# Altium PCB PCB7.PcbDoc
Units mm, origin at the board's own origin, x right, y up, seen from the top; angles counter-clockwise.
Board outline 162.31 x 68.96 mm, 2 copper layers (Top Layer, Bottom Layer); 35 components, 45 nets, 246 pads, 29 vias.
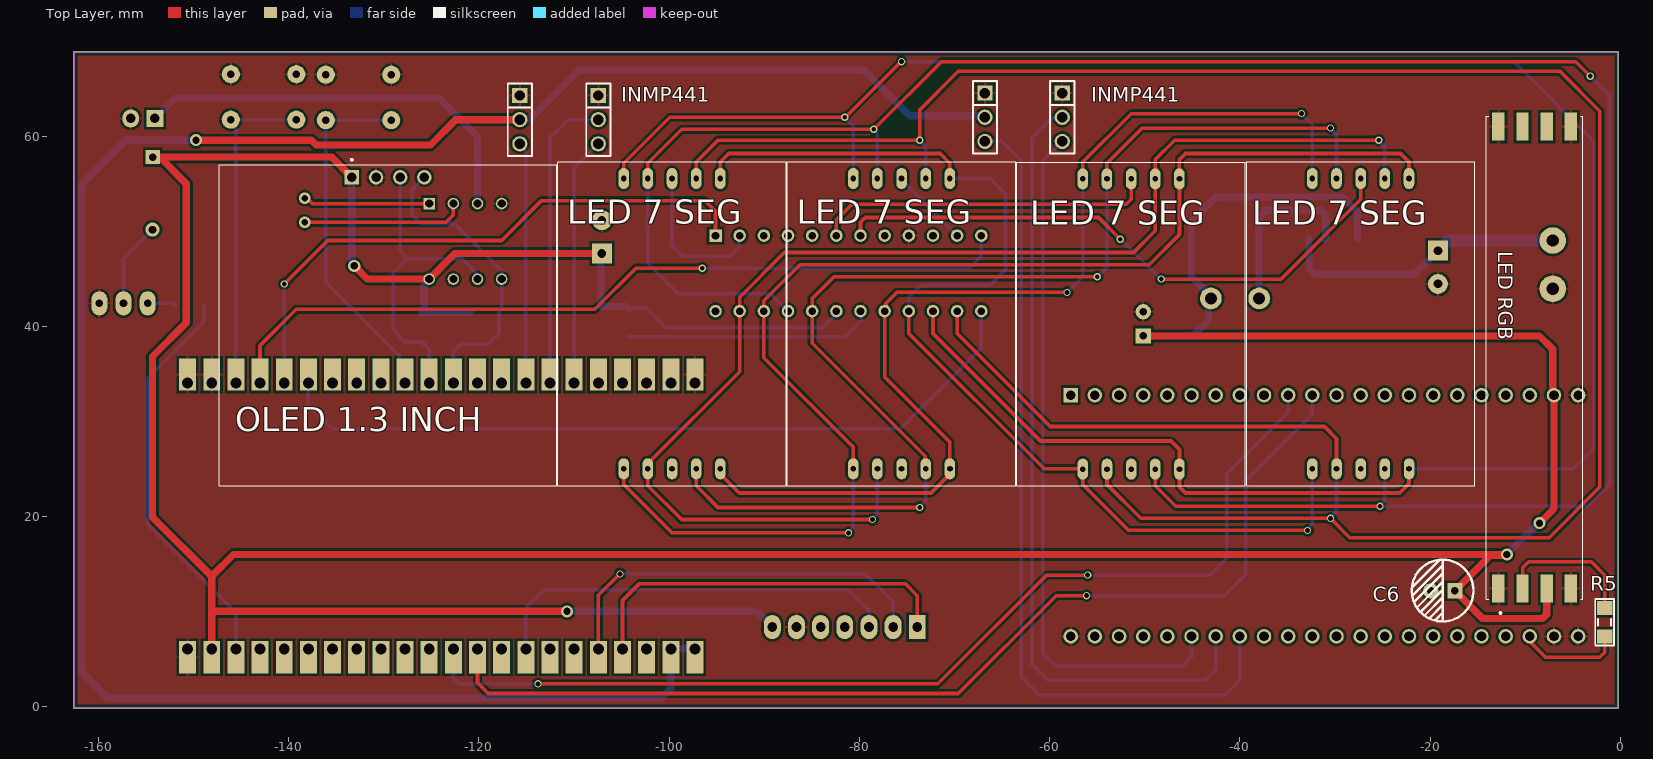
[diagram p0: Top Layer view]
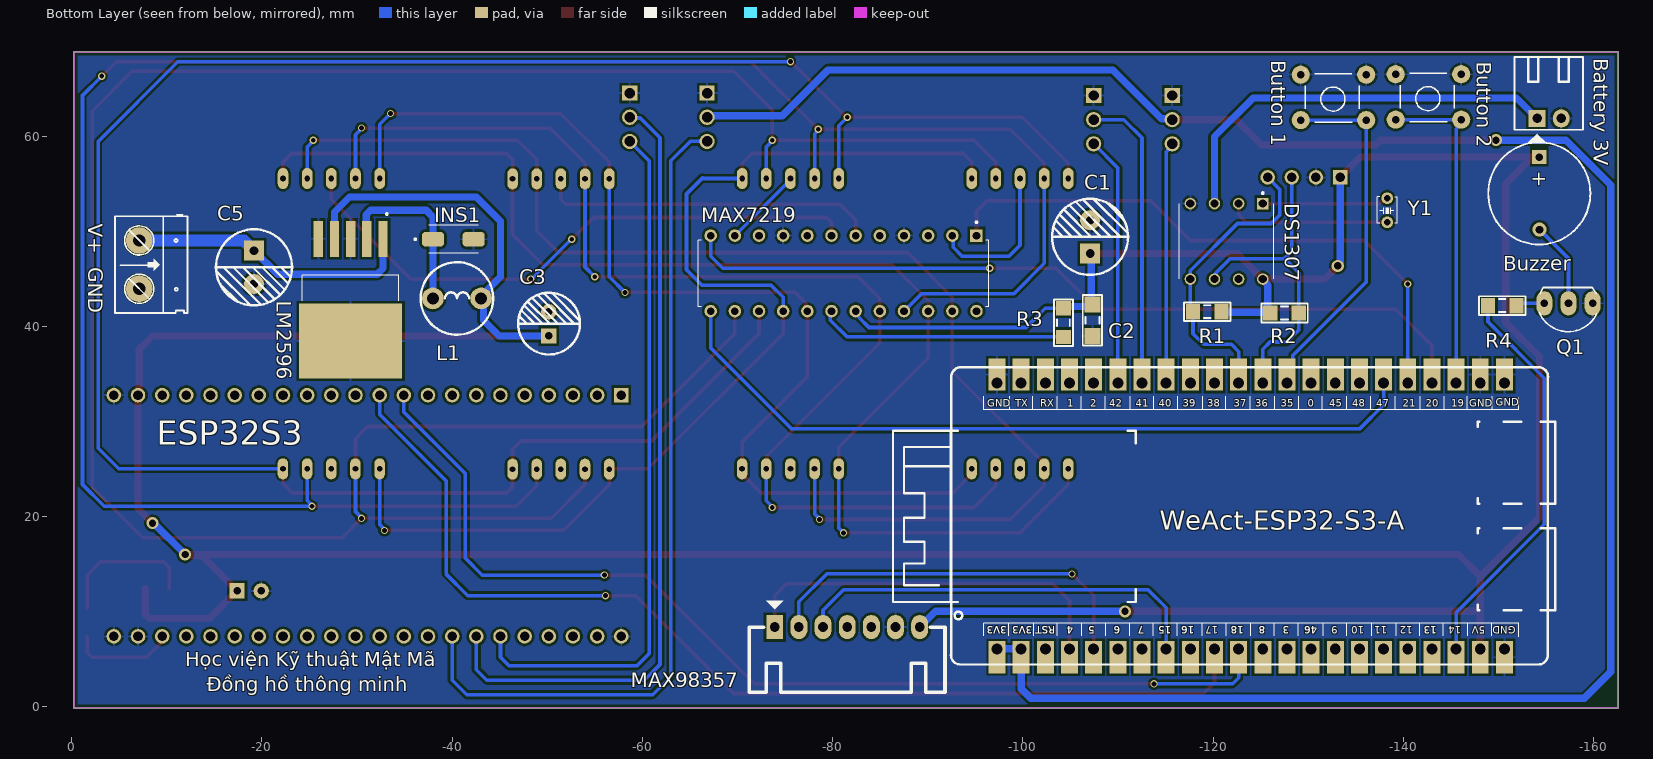
[diagram p1: Bottom Layer view, seen from below]
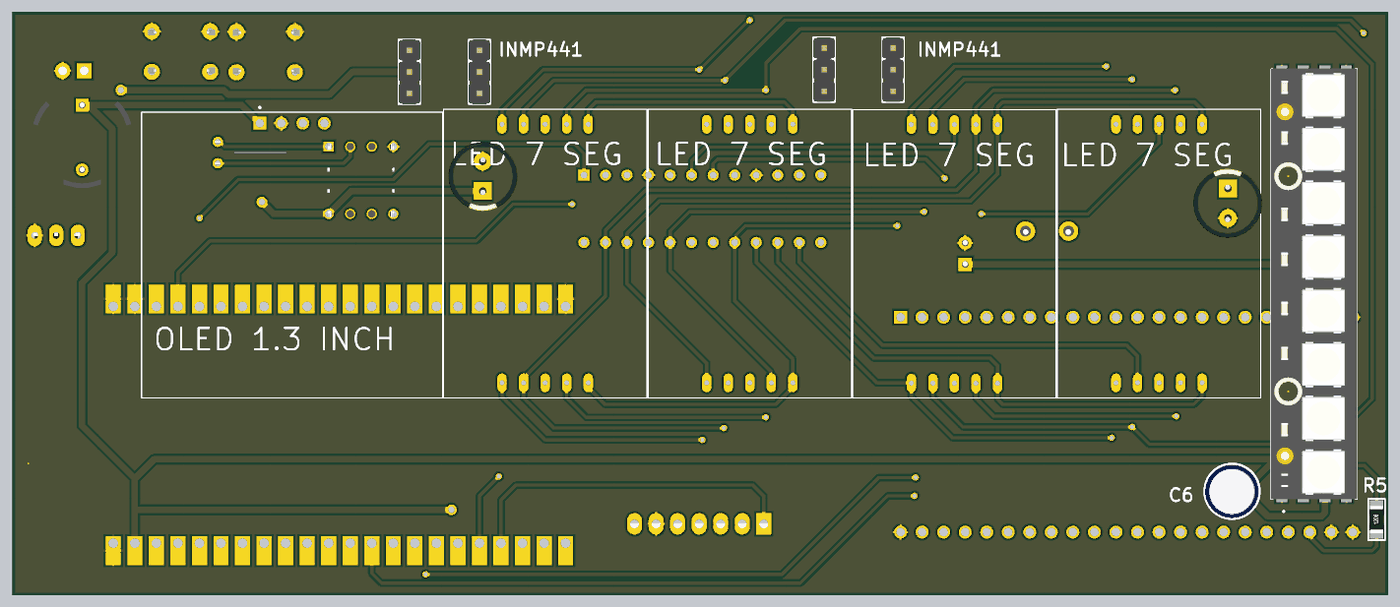
[diagram p2: 3D render of the assembled board from above, using the file's embedded part models]
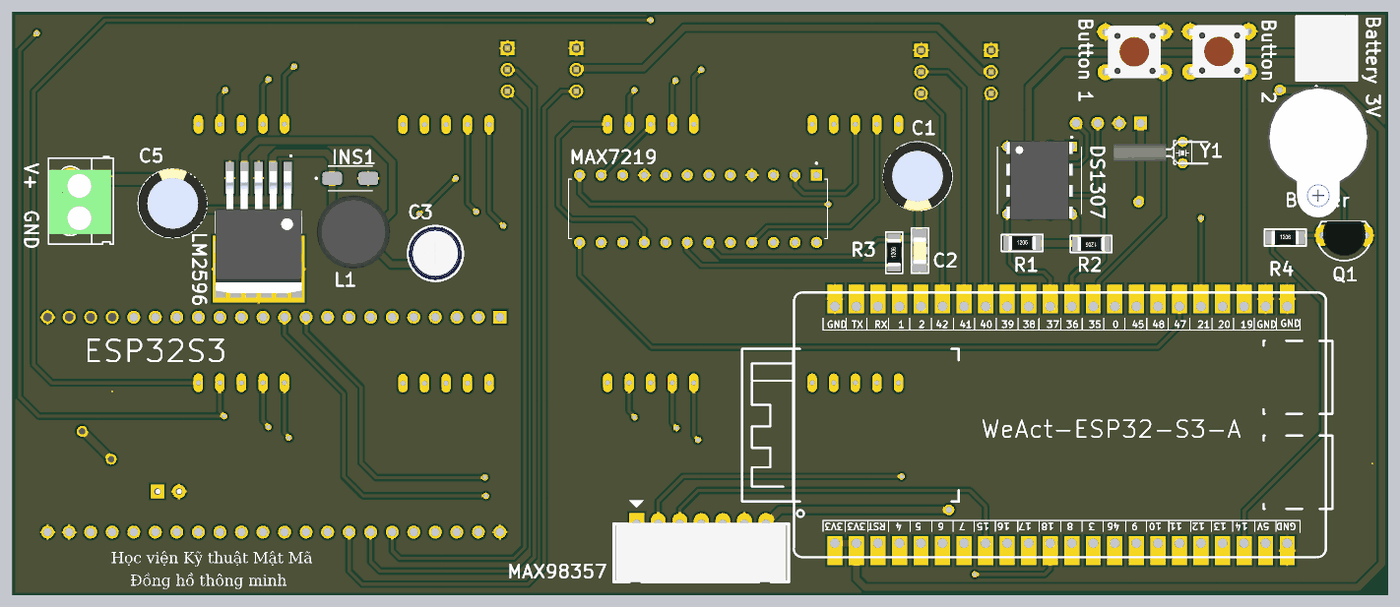
[diagram p3: 3D render of the assembled board from below, using the file's embedded part models]

## Layer stack, top to bottom
Top Solder: solder mask 0.0102, Solder Resist, Dk 3.5
Top Layer: signal copper 0.0356
Dielectric 1: dielectric 0.32, FR-4, Dk 4.8
Bottom Layer: signal copper 0.0356
Bottom Solder: solder mask 0.0102, Solder Resist, Dk 3.5

## Board outline
-162.56,-0.127 -0.254,-0.127 -0.254,4.064 -0.254,68.834 -162.56,68.834

## Design rules (kind name [scope] priority, off if disabled: settings)
Clearance [All] p1: gap=0.254 ignorepadtopadclearanceinfootprint=FALSE except(0: Arc-Hole Track-Hole SMDPad-Hole THPad-Hole Via-Hole Fill-Hole Poly-Hole Region-Hole Text-Hole)
ComponentClearance [All] p1: gap=0 collisioncheckmode=3 verticalgap=0 showdistances=FALSE
PolygonConnect [All] p1: connectstyle=Relief reliefconductorwidth=0.254 reliefentries=4 polygonreliefangle="90 Angle" airgapwidth=0.254
RoutingVias [All] p1: holewidth=0.711 width=1.27 viastyle="Through Hole" minholewidth=0.711 minwidth=1.27 maxholewidth=0.711 maxwidth=1.27
SolderMaskExpansion [All] p1: expansion=0.102 istentingtop=FALSE
Width [All] p1: maxlimit=1.27 minlimit=0.381 preferedwidth=0.762
29 further rules are at their usual default settings.

## Classes and differential pairs
component class Display: "Battery 3V" C1 C2 DS1307 "LED 7 SEG" MAX7219 "OLED 1.3 INCH" R1 R2 R3 Y1
component class ESP32S3: C3 C5 C6 INS1 L1 "LED RGB" Q1 R4 R5

## Components (designator, comment, footprint, x,y, rotation, side; value= is the part's Value field where it differs from the comment)
"Battery 3V" "Battery 3V" "Header 2P DC 2.54" -154.051,61.849 r90 bottom (schematic designator H1)
"Button 1" "Button" "Nut Nhan 4 Chan Cam 6x6" -135.763,61.468 r0 bottom (schematic designator BT1)
"Button 2" "Button" "Nut Nhan 4 Chan Cam 6x6" -145.745,61.519 r0 bottom (schematic designator BT2)
Buzzer "Coi Chip Speaker" "Coi Chip Speacker" -154.292,57.785 r270 bottom (schematic designator LS1)
C1 "470uF" "TU HOA 8mm" -107.061,49.403 r90 bottom
C2 "102" "tu 1206" -107.315,40.64 r270 bottom
C3 "220uF" "Tu Hoa 6.5MM" -50.19,40.284 r90 bottom
C5 "680uF" "TU HOA 8mm" -19.177,46.2 r270 bottom
C6 "220uF" "Tu Hoa 6.5MM" -18.694,12.217 r180 top
DS1307 "DS1307" DIP794W47P254L991H457Q8 -121.412,48.928 r270 bottom (schematic designator IC1)
ESP32S3 "ESP32-S3-DEVKITC-1-N8R2" XCVR_ESP32-S3-DEVKITC-1-N8R2 -27.815,21.336 r270 bottom (schematic designator U3)
INMP441 "MIC INMP441" "JP 1x3 DT" -58.674,64.516 r270 top (schematic designator JP3)
INMP441 "MIC INMP441" "JP 1x3 DT" -107.442,64.262 r270 top (schematic designator JP5)
INS1 "IN5822" DIOM5226X240N -40.132,49.149 r180 bottom
JP2 "Pinout MIC INMP441" "JP 1x3 DT" -66.802,64.516 r270 top
JP4 "Pinout MIC INMP441" "JP 1x3 DT" -115.697,64.262 r270 top
L1 "33uH" "CUON CAM 100uH3A" -40.513,42.926 r180 bottom
"LED 7 SEG" "Led 7 seg" 2.3_7-SEG_DIS -63.565,59.708 r0 top (schematic designator DS2)
"LED 7 SEG" "Led 7 seg" 2.3_7-SEG_DIS -39.305,20.846 r180 top (schematic designator DS4)
"LED 7 SEG" "Led 7 seg" 2.3_7-SEG_DIS -63.435,20.81 r180 top (schematic designator DS3)
"LED 7 SEG" "Led 7 seg" 2.3_7-SEG_DIS -87.695,59.708 r0 top (schematic designator DS1)
"LED RGB" "1426" LED_1426 -9.017,36.703 r90 top (schematic designator D1)
LM2596 "LM2596S-5.0" TO170P1524X483-6N -29.337,42.799 r270 bottom (schematic designator VR1)
MAX7219 "MAX7219EWG" DIP794W47P254L3054H457Q24 -81.153,45.56 r270 bottom (schematic designator U1)
MAX98357 "Pinout MAX89375" "Header 7P DC 2.54" -73.913,8.382 r270 bottom (schematic designator H2)
"OLED 1.3 INCH" "OLED_128X64_1.3_I2C" LCD_OLED_128X64_1.3_I2C -129.54,40.109 r0 top (schematic designator DS5)
Q1 "C1815" TO92 -157.353,42.418 r0 bottom value=C9014
R1 "4.7k" "tro smd 1206" -119.38,41.529 r180 bottom
R2 "4.7k" "tro smd 1206" -127.508,41.402 r0 bottom
R3 "47k" "tro smd 1206" -104.267,40.386 r90 bottom
R4 "220" "tro smd 1206" -150.392,42.164 r180 bottom
R5 "220" "tro smd 1206" -1.651,8.89 r90 top
U2 "WeAct-ESP32-S3-A" WeAct-ESP32-S3-A -126.873,19.685 r90 bottom
"V+  GND" "Nguồn từ pin: 7.4V" "Con 2 KF301 5.08" -7.112,49.022 r270 bottom (schematic designator KF1)
Y1 "32.768Khz" "Thach Anh 2 Chan 32,768 KHz" -138.303,50.927 r0 bottom value=4Mhz

## Footprints (in the part's own frame and the unit in brackets; to place one, negate y for a bottom-side part, rotate by r counter-clockwise, add the part's x,y. Pads: shape width x height; smd on the part's side, far side on the other; paste and mask are expansions set on the pad)
2.3_7-SEG_DIS [mm]
  oval 1.108x2.216 hole 0.6: 1(-17.08,-34.689) 2(-14.54,-34.689) 3(-12,-34.689) 4(-9.46,-34.689) 5(-6.92,-34.689) 6(-6.923,-4.173) 7(-9.463,-4.173) 8(-12.003,-4.173) 9(-14.543,-4.173) 10(-17.083,-4.173)
  silkscreen extent -24,-36.45 0,-2.41
"Coi Chip Speacker" [mm]
  rect 1.5x1.5 hole 0.8: 1(0,0)
  round 1.5 hole 0.8: 2(7.62,0.013)
  silkscreen extent -1.55,-5.38 9.18,5.36, body extent -2.22,-6 13.24,6, height 4.5
"Con 2 KF301 5.08" [mil]
  round 110 hole 50: 1(0,0) 2(200,0)
  silkscreen extent -106,-100 300,200, body extent -45,-97 255,190, height 335
"CUON CAM 100uH3A" [mil] "100uH3A"
  round 90 hole 50: 1(-100,0) 2(100,0)
  silkscreen extent -150,-150 150,150, body extent -171,-175 171,167, height 394
DIOM5226X240N [mm]
  rrect50% 2.33x1.55 smd: A(2.135,0) C(-2.135,0)
  silkscreen extent -4.1,-1.46 2.6,1.46
DIP794W47P254L991H457Q8 [mm]
  rect 1.21x1.21 / inner round 1.21 / far side rect 1.21x1.21 hole 0.86: 1(-3.97,3.81)
  round 1.21 hole 0.86: 2(-3.97,1.27) 3(-3.97,-1.27) 4(-3.97,-3.81) 5(3.97,-3.81) 6(3.97,-1.27) 7(3.97,1.27) 8(3.97,3.81)
  silkscreen extent -5.17,-4.95 3.94,4.95, body extent -4.69,-3.95 4.69,3.95, height 4.57
DIP794W47P254L3054H457Q24 [mm]
  rect 1.318x1.318 / inner round 1.318 / far side rect 1.318x1.318 hole 0.81: 1(-3.97,13.97)
  round 1.318 hole 0.81: 2(-3.97,11.43) 3(-3.97,8.89) 4(-3.97,6.35) 5(-3.97,3.81) 6(-3.97,1.27) 7(-3.97,-1.27) 8(-3.97,-3.81) 9(-3.97,-6.35) 10(-3.97,-8.89) 11(-3.97,-11.43) 12(-3.97,-13.97) 13(3.97,-13.97) 14(3.97,-11.43) 15(3.97,-8.89) 16(3.97,-6.35) 17(3.97,-3.81) 18(3.97,-1.27) 19(3.97,1.27) 20(3.97,3.81) 21(3.97,6.35) 22(3.97,8.89) 23(3.97,11.43) 24(3.97,13.97)
  silkscreen extent -5.47,-15.27 3.49,15.27
"Header 2P DC 2.54" [mil]
  rect 70x70 hole 39.37 unplated: 1(0,0)
  oval 75x70 hole 39.37 unplated: 2(0,-100)
  silkscreen extent -100,-190 255,93, body extent -50,-190 250,90, height 237
"Header 7P DC 2.54" [mil]
  rect 100x70 hole 40: 1(0,0.04)
  oval 100x70 hole 40: 2(0,100.04) 3(0,200.04) 4(0,300.04) 5(0,400.04) 6(0,500.04) 7(0,600.04)
  silkscreen extent -110,-105 270,705, body extent -5,-94 271,694, height 237
"JP 1x3 DT" [mm]
  rect 1.6x1.6 hole 1.1: 1(0,0)
  round 1.6 hole 1.1: 2(2.54,0) 3(5.08,0)
  silkscreen extent -1.27,-1.27 6.35,1.27, body extent -1.27,-1.27 6.35,1.27, height 8.54
LCD_OLED_128X64_1.3_I2C [mm]
  rect 1.508x1.508 / inner round 1.508 / far side rect 1.508x1.508 hole 1: 1(-3.81,15.55)
  round 1.508 hole 1: 2(-1.27,15.55) 3(1.27,15.55) 4(3.81,15.55)
  round 0 all layers, no hole: ""(-31.115,-24.615) ""(-31.115,-24.615) ""(-31.115,-24.615) ""(-31.115,-24.615)
  silkscreen extent -17.75,-16.85 17.75,17.5
LED_1426 [mm]
  rect 2.95x1.3 smd: 1(-24.28,3.81) 2(-24.28,1.27) 3(-24.28,-1.27) 4(-24.28,-3.81) 5(24.28,-3.81) 6(24.28,-1.27) 7(24.28,1.27) 8(24.28,3.81)
  round 0 all layers, no hole: SH1(-12.7,3.048) SH2(12.7,3.048)
  silkscreen extent -26.95,-5.08 25.4,5.08, body extent -25.4,-5.08 25.4,5.08, height 3.19
"Nut Nhan 4 Chan Cam 6x6" [mil] "SW button 4pin, 250 x250 mil"
  round 75 hole 31: 1(-13,-8) 1(258,-8) 2(-13,-196) 2(258,-196)
  silkscreen extent 15,-215 240,0, body extent -31,-225 281,19, height 276
"Thach Anh 2 Chan 32,768 KHz" [mil]
  round 48 hole 28: 1(0,0) 2(0,-100)
  silkscreen extent -42,-106 42,4, body extent -120,-105 321,6, height 66
TO92 [mil] "TO-92"
  oval 66x100 hole 32: 1(-100,0) 2(0,0) 3(100,0)
  silkscreen extent -117,-65 120,118, body extent -109,-66 109,96, height 245
TO170P1524X483-6N [mm]
  rect 3.79x0.99 smd: 1(-6.4,3.4) 2(-6.4,1.7) 3(-6.4,0) 4(-6.4,-1.7) 5(-6.4,-3.4)
  rect 7.88x10.84 smd paste-6: 6(4.35,0)
  silkscreen extent -9.1,-5.08 0.09,5.08, body extent -7.18,-5.08 7.18,5.08, height 4.65
"tro smd 1206" [mm]
  rect 1.5x1.6 smd: 1(-1.5,0) 2(1.5,0)
  silkscreen extent -2.44,-0.99 2.44,0.99, body extent -1.6,-0.8 1.6,0.8, height 0.6
"tu 1206" [mm]
  rect 1.7x1.7 smd: 1(-1.65,0) 2(1.65,0)
  silkscreen extent -2.67,-1.02 2.67,1.02, body extent -1.57,-0.8 1.63,0.8, height 0.94
"Tu Hoa 6.5MM" [mm]
  rect 1.6x1.6 hole 0.8: 1(-1.295,0.025)
  round 1.6 hole 0.8: 2(1.245,0.025)
  silkscreen extent -3.25,-3.25 3.25,3.25, body extent -3.15,-3.15 3.2,3.2, height 14.55
"TU HOA 8mm" [mm]
  rect 2.1x2.1 hole 0.9: 1(-1.75,0)
  round 2.1 hole 0.9: 2(1.75,0)
  silkscreen extent -4,-4 4,4, body extent -4.1,-4.07 4.1,4.13, height 13.81
WeAct-ESP32-S3-A [mil]
  rect 133x70 hole 45 copper offset -35,0 paste+0 mask+2: 1(-535,1165) 2(-535,1065) 3(-535,965) 4(-535,865) 5(-535,765) 6(-535,665) 7(-535,565) 8(-535,465) 9(-535,365) 10(-535,265) 11(-535,165) 12(-535,65) 13(-535,-35) 14(-535,-135) 15(-535,-235) 16(-535,-335) 17(-535,-435) 18(-535,-535) 19(-535,-635) 20(-535,-735) 21(-535,-835) 22(-535,-935)
  rect 133x70 hole 45 copper offset 35,0 paste+0 mask+2: 23(565,-935) 24(565,-835) 25(565,-735) 26(565,-635) 27(565,-535) 28(565,-435) 29(565,-335) 30(565,-235) 31(565,-135) 32(565,-35) 33(565,65) 34(565,165) 35(565,265) 36(565,365) 37(565,465) 38(565,565) 39(565,665) 40(565,765) 41(565,865) 42(565,965) 43(565,1065) 44(565,1165)
  silkscreen extent -600,-1145 630,1595
XCVR_ESP32-S3-DEVKITC-1-N8R2 [mm]
  rect 1.53x1.53 / inner round 1.53 / far side rect 1.53x1.53 hole 1.02: J1_1(-11.43,29.97)
  round 1.53 hole 1.02: J1_2(-11.43,27.43) J1_3(-11.43,24.89) J1_4(-11.43,22.35) J1_5(-11.43,19.81) J1_6(-11.43,17.27) J1_7(-11.43,14.73) J1_8(-11.43,12.19) J1_9(-11.43,9.65) J1_10(-11.43,7.11) J1_11(-11.43,4.57) J1_12(-11.43,2.03) J1_13(-11.43,-0.51) J1_14(-11.43,-3.05) J1_15(-11.43,-5.59) J1_16(-11.43,-8.13) J1_17(-11.43,-10.67) J1_18(-11.43,-13.21) J1_19(-11.43,-15.75) J1_20(-11.43,-18.29) J1_21(-11.43,-20.83) J1_22(-11.43,-23.37) J3_1(13.93,29.97) J3_2(13.93,27.43) J3_3(13.93,24.89) J3_4(13.93,22.35) J3_5(13.93,19.81) J3_6(13.93,17.27) J3_7(13.93,14.73) J3_8(13.93,12.19) J3_9(13.93,9.65) J3_10(13.93,7.11) J3_11(13.93,4.57) J3_12(13.93,2.03) J3_13(13.93,-0.51) J3_14(13.93,-3.05) J3_15(13.93,-5.59) J3_16(13.93,-8.13) J3_17(13.93,-10.67) J3_18(13.93,-13.21) J3_19(13.93,-15.75) J3_20(13.93,-18.29) J3_21(13.93,-20.83) J3_22(13.93,-23.37)

## Part data
"Battery 3V": library part "Header 2P 2.54 Duc Cong", "Cắm", Chung_Loai=Cắm, Don_Vi=Con, Ma_Hang=MH002852, Ten_Linh_Kien="Header 2P XH2.54-2P Đực Cong"
"Button 1" "Button 2": library part "Nut Nhan 4 Chan Cam 6x6", "Nut Nhan 4 Chan 6x6mm", Ma_Hang=MH004584, Ten="Nút Nhấn 4 Chân 6x6x5MM DIP"
Buzzer: "Còi chip"
C1: library part "Tu Hoa 470uF 50V 10x17", "Cắm", Chung_Loai=Cắm, Don_Vi=Con, Ma_Hang=MH006866, So_Chan=2, Ten_Linh_Kien="Tụ Hóa 470uF 50V"
C2: library part "Tu 1206 102 50V 10%", "Dán", Chung_Loai=Dán, Don_Vi=Con, Ma_Hang=MH004542, So_Chan=2, Ten_Linh_Kien="Tụ 1206 102-1nF 10% 50V"
C3 C5 C6: library part "Tu Hoa 22uF 400V 13x20", "Cắm", Chung_Loai=Cắm, Don_Vi=Con, Ma_Hang=MH004801, So_Chan=2, Ten_Linh_Kien="Tụ Hóa 22uF 400V 13x20MM"
DS1307: "Real Time Clock (RTC) IC Clock/Calendar 56B IÂ²C, 2-Wire Serial 8-SOIC (0.154, 3.90mm Width)", Package="DIP-8 Maxim Integrated", Availability="In Stock", Check_prices=https://www.snapeda.com/parts/DS1307/Maxim+Integrated/view-part/?ref=eda, MF="Maxim Integrated", MP=DS1307, Price=None, Purchase-URL=https://pricing.snapeda.com/search/part/DS1307/?ref=eda, SnapEDA_Link=https://www.snapeda.com/parts/DS1307/Maxim+Integrated/view-part/?ref=snap
ESP32S3: "WiFi Development Tools - 802.11 (Engineering Samples Only) ESP32-S3 General-Purpose Development Board, ESP32-S3-WROOM-1-N8R2, with Pin Header", Package=None, Check_prices=https://www.snapeda.com/parts/ESP32-S3-DEVKITC-1-N8R2/Espressif+Systems/view-part/?ref=eda, MF="Espressif Systems", MP=ESP32-S3-DEVKITC-1-N8R2, SnapEDA_Link=https://www.snapeda.com/parts/ESP32-S3-DEVKITC-1-N8R2/Espressif+Systems/view-part/?ref=snap
INMP441 INMP441 JP2 JP4: library part "JP 1x3 2.54 Duc Thang", "Cắm", Chung_Loai=Cắm, Don_Vi=Con, Ma_Hang=MH000903, Ten_Linh_Kien="Jump Đơn Đực 2.54MM 1x40P Thẳng 11MM"
INS1: library part B340A-13-F, "Diode Schottky 40V 3A Surface Mount SMA", Package="DO-214 Diodes Inc.", Availability=Unavailable, MF="Diodes Inc.", MP=B340A-13-F, Price=None, SnapEDA_Link=https://www.snapeda.com/parts/B340A-13-F/Diodes%20Inc./view-part/78704/?ref=snap
L1: library part "CUON CAM 100uH DIP", "Dán", Chung_Loai=Dán, Don_Vi=Con, Ma_Hang=MH002209, Ten_Linh_Kien="Cuộn Cảm 100uH 3A 8x10MM"
"LED 7 SEG" "LED 7 SEG" "LED 7 SEG" "LED 7 SEG": library part HDSP-511Y, "Display Modules - LED Character and Numeric Yellow 7-Segment 1 Character Common Anode 2.15V 20mA 0.673 H x 0.488 W x 0.315 D (17.10mm x 12.40mm x 8.00mm) 10-DIP (0.600, 15.24mm)", Package=None, Availability="Not in stock", Check_prices=https://www.snapeda.com/parts/HDSP-511Y/Broadcom+Limited/view-part/?ref=eda, MF="Broadcom Limited", MP=HDSP-511Y, Price=None, SnapEDA_Link=https://www.snapeda.com/parts/HDSP-511Y/Broadcom+Limited/view-part/?ref=snap
"LED RGB": "NeoPixel Stick - 8 x WS2812 5050 RGB LED with Integrated Drivers", Package=None, Check_prices=https://www.snapeda.com/parts/1426/Adafruit+Industries/view-part/?ref=eda, MF=Adafruit, MP=1426, SnapEDA_Link=https://www.snapeda.com/parts/1426/Adafruit+Industries/view-part/?ref=snap
LM2596: "SIMPLE SWITCHER&reg; 4.5V to 40V, 3A Low Component Count Step-Down Regulator", Package="TO-263-5 Texas Instruments", Availability="In Stock", Check_prices=https://www.snapeda.com/parts/LM2596S-5.0/NOPB/Texas+Instruments/view-part/?ref=eda, MF="Texas Instruments", MP=LM2596S-5.0/NOPB, Price=None, Purchase-URL=https://pricing.snapeda.com/search/part/LM2596S-5.0/NOPB/?ref=eda, SnapEDA_Link=https://www.snapeda.com/parts/LM2596S-5.0/NOPB/Texas+Instruments/view-part/?ref=snap
MAX7219: "LED Driver 64 Segment 330000uA Supply Current 24-Pin SOIC W Tube", Package="SOIC-24 Maxim", Check_prices=https://www.snapeda.com/parts/MAX7219EWG+/Analog+Devices/view-part/?ref=eda, MF="Analog Devices", MP=MAX7219EWG+, SnapEDA_Link=https://www.snapeda.com/parts/MAX7219EWG+/Analog+Devices/view-part/?ref=snap
MAX98357: library part "Header 7P 2.54 Duc Cong", "Cắm", Chung_Loai=Cắm, Don_Vi=Con, Ma_Hang=MH004118, Ten_Linh_Kien="Header 7P XH2.54-7P Đực Cong"
"OLED 1.3 INCH": "Non-Touch Graphic LCD Display Module Transmissive White OLED, Monochrome I2C 1.3 (33.02mm) 128 x 64", Package=None, Check_prices=https://www.snapeda.com/parts/OLED%20128x64%201.3%22%20I2C/UNIVERSAL-SOLDER+Electronics+Ltd/view-part/?ref=eda, MF="UNIVERSAL-SOLDER Electronics Ltd", MP="OLED 128x64 1.3&quot; I2C", SnapEDA_Link=https://www.snapeda.com/parts/OLED%20128x64%201.3%22%20I2C/UNIVERSAL-SOLDER+Electronics+Ltd/view-part/?ref=snap
Q1: library part "Trans C1815 DIP", "NPN transistor"
R1 R2 R3 R4 R5: library part "Tro 1206 5% 1k", "Dán", Chung_Loai=Dán, Don_Vi=Con, Ma_Hang=MH005904, So_Chan=2, Ten_Linh_Kien="Trở 1206 5% 1k"
"V+  GND": library part "CON 2 KF301", "Cắm", Chung_Loai=Cắm, Don_Vi=Con, Ma_Hang=MH000987, Ten_Linh_Kien="CON 2 KF301-2P 5.08MM Xanh Dương"
Y1: library part "Thach Anh 2 chan Cam", "Crystal For all Crystal 2pin."
U2: Add into BOM=yes, Convert to PCB=yes, Device=WeAct-ESP32-S3-A, Symbol=WeAct-ESP32-S3-A

## Via types
v1: diameter 0.762, hole 0.508, Top Layer to Bottom Layer, 24 vias
v2: diameter 1.27, hole 0.762, Top Layer to Bottom Layer, 5 vias

## Nets (pads, with @x,y where several pads share a name; then routed paths per layer and width w, separated by ;. In a path a pad name is that pad's centre, name@x,y a point inside that pad or via, vN(x,y) a via of type N, cw(c..) or ccw(c..) an arc to the next point about the centre after c; other vN are vias at no path point)
+3.3: JP2.2 JP4.2 U2.1 U2.2 | length 223.9
  Top Layer w0.762: v2(-149.733,59.563) -137.599,59.563 -137.091,59.055 -125.095,59.055 -122.428,61.722 JP4.2
  Bottom Layer w0.762: v2(-149.733,59.563) -157.099,59.563 -161.798,54.864 -161.798,3.683 -159.004,0.889 -100.838,0.889 -99.822,1.905 U2.2 U2.1 ; JP4.2 -115.593,61.826 -114.577,61.826 -109.474,66.929 -79.502,66.929 -74.709,62.136 -66.962,62.136 JP2.2
A: "LED 7 SEG.7" MAX7219.14 | length 261.5
  Top Layer w0.381: -97.158,55.535 -97.158,57.274 -94.869,59.563 v1(-73.66,59.563) -73.66,62.738 -69.596,66.802 -6.35,66.802 -2.159,62.611 -2.159,23.114 -7.493,17.78 -28.448,17.78 v1(-30.48,19.812) -50.419,19.812 -53.975,23.368 -53.975,25.019 ; MAX7219.14 -69.723,39.243 -59.944,29.464 -31.115,29.464 -29.842,28.191 -29.842,25.019
  Bottom Layer w0.381: v1(-73.66,59.563) -73.66,59.48 -73.028,58.848 -73.028,55.535 ; v1(-30.48,19.812) -30.48,19.883 -29.842,20.521 -29.842,25.019
B: "LED 7 SEG.6" MAX7219.16 | length 116.1
  Top Layer w0.381: -94.618,55.535 -94.615,55.538 -94.615,57.277 -93.726,58.166 -71.501,58.166 -70.488,57.153 -70.488,55.535 ; MAX7219.16 -74.803,39.243 -60.579,25.019 -56.515,25.019 -56.515,23.368 -51.689,18.542 v1(-32.893,18.542)
  Bottom Layer w0.381: MAX7219.16 -74.803,43.053 -73.533,44.323 -66.263,44.323 -64.643,45.943 -64.643,53.913 -66.325,55.595 -66.385,55.535 -70.488,55.535 ; v1(-32.893,18.542) -32.893,18.645 -32.382,19.156 -32.382,25.019
Bclk: MAX98357.2 U2.5 | length 41.4
  Top Layer w0.381: U2.5 -107.442,11.719 -105.191,13.97 v1(-105.156,13.97)
  Bottom Layer w0.381: v1(-105.156,13.97) -79.375,13.97 -76.454,11.049 MAX98357.2
Button_1: "Button 1.1" U2.32 | length 38
  Bottom Layer w0.381: -129.21,61.671 -136.093,61.671 -136.093,44.653 -128.376,36.936 -128.376,34.65 U2.32
Button_2: "Button 2.1" U2.25 | length 34.8
  Bottom Layer w0.381: U2.25 -145.542,60.776 -146.075,61.31 -146.075,61.722 -139.192,61.722
C: "LED 7 SEG.4" MAX7219.20 | length 127.1
  Top Layer w0.381: -97.155,25.019 -97.155,23.241 -94.869,20.955 v1(-73.66,20.955) ; MAX7219.20@-84.963,41.503 -84.963,38.227 -73.082,26.346 -73.082,25.076 -73.025,25.019 ; MAX7219.20 -84.963,42.926 -82.677,45.212 v1(-54.991,45.212) ; -53.978,55.535 -53.978,57.147 -50.292,60.833 v1(-30.48,60.833)
  Bottom Layer w0.381: v1(-73.66,20.955) -73.66,21.032 -73.025,21.667 -73.025,25.019 ; v1(-54.991,45.212) -53.975,46.228 -53.975,55.499 ; v1(-30.48,60.833) -30.48,60.756 -29.845,60.121 -29.845,55.535
CLK: MAX7219.13 U2.28 | length 81.5
  Bottom Layer w0.381: U2.28 -137.922,31.75 -135.382,29.21 -75.692,29.21 -67.183,37.719 MAX7219.13
Coi: R4.1 U2.20 | length 42.4
  Bottom Layer w0.381: R4.1 -148.892,40.465 -154.813,34.544 -154.813,19.177 -145.542,9.906 U2.20
D: "LED 7 SEG.2" MAX7219.23 | length 137.2
  Top Layer w0.381: v1(-78.613,19.685) -98.679,19.685 -102.235,23.241 -102.235,25.019 -102.235,25.573 -92.583,35.225 -92.583,43.053 -87.884,47.752 -51.181,47.752 -48.898,50.035 -48.898,55.499 -48.898,57.528 -46.863,59.563 v1(-25.4,59.563)
  Bottom Layer w0.381: v1(-78.613,19.685) -78.613,19.788 -78.105,20.296 -78.105,25.019 ; v1(-25.4,59.563) -25.4,59.486 -24.765,58.851 -24.765,55.535
Din: MAX98357.3 U2.8 | length 43.8
  Bottom Layer w0.381: U2.8 -115.062,10.414 -113.157,12.319 -81.153,12.319 -78.994,10.16 MAX98357.3
DIN_LED: MAX7219.1 U2.27 | length 62.4
  Top Layer w0.381: v1(-140.462,44.45) -135.89,49.022 -117.602,49.022 -113.411,53.213 -96.266,53.213 -95.123,52.07 MAX7219.1
  Bottom Layer w0.381: U2.27 v1(-140.462,44.45)
DP: "LED 7 SEG.5" MAX7219.17 | length 113.5
  Top Layer w0.381: -94.615,25.019 -94.615,24.465 -92.629,22.479 -72.471,22.479 -70.485,24.465 -70.485,25.019 -70.485,27.813 -77.343,34.671 MAX7219.17 -77.204,41.729 -77.204,42.43 -76.073,43.561 v1(-58.166,43.561) ; -56.518,55.535 -56.518,57.274 -51.435,62.357 v1(-33.528,62.357)
  Bottom Layer w0.381: v1(-58.166,43.561) -56.515,45.212 -56.515,55.499 ; v1(-33.528,62.357) -33.493,62.357 -32.385,61.249 -32.385,55.535
E: "LED 7 SEG.1" MAX7219.22 | length 136.8
  Top Layer w0.381: -104.775,25.019 -104.775,23.368 -99.695,18.288 v1(-81.153,18.288) ; -80.645,25.019 -80.645,27.305 -90.043,36.703 -90.043,42.672 -86.233,46.482 -49.53,46.482 -46.355,49.657 -46.355,55.499 ; -46.358,55.535 -46.358,57.528 -45.72,58.166 -23.114,58.166 -22.225,57.277 -22.225,55.535
  Bottom Layer w0.381: v1(-81.153,18.288) -80.645,18.796 -80.645,25.019
F: "LED 7 SEG.9" MAX7219.21 | length 236.1
  Top Layer w0.381: -102.238,55.535 -102.238,57.147 -98.679,60.706 v1(-78.486,60.706) -71.374,67.818 -4.699,67.818 v1(-3.175,66.294) ; -48.895,25.019 -48.895,23.241 -46.736,21.082 v1(-25.273,21.082)
  Bottom Layer w0.381: -102.238,55.535 -102.238,46.612 -99.06,43.434 -89.347,43.434 MAX7219.21 ; v1(-78.486,60.706) -78.486,60.603 -78.108,60.225 -78.108,55.535 ; -24.762,25.019 -24.762,21.696 -25.273,21.185 v1(-25.273,21.082) -3.429,21.082 -1.143,23.368 -1.143,64.262 v1(-3.175,66.294)
FB: "LED RGB.3" "OLED 1.3 INCH.1" Buzzer.1 C1.1 C2.1 C3.1 C6.1 DS1307.8 ESP32S3.J1_21 L1.2 LM2596.4 MAX7219.19 MAX98357.7 R1.2 R2.2 R3.2 U2.21 | length 482.9
  Top Layer w0.762: Buzzer.1 Buzzer.1@-153.543,57.785 ; U2.21 -148.082,9.906 ; -133.35,55.659 -135.476,57.785 Buzzer.1@-153.543,57.785 ; v2(-133.096,46.355) -131.699,44.958 DS1307.8 -122.527,47.653 C1.1 ; v2(-110.744,10.033) -147.955,10.033 -148.082,9.906 ; C3.1 -8.509,38.989 -7.112,37.592 -7.112,32.893 ESP32S3.J1_21 -6.985,20.833 -8.509,19.309 v2(-8.509,19.304) ; -7.747,12.423 -7.747,9.717 -8.193,9.271 -14.478,9.271 C6.1 -13.686,15.905 -12.035,15.905 v2(-11.938,16.002) -145.796,16.002 -148.082,13.716 ; Buzzer.1@-153.543,57.785 -150.749,54.991 -150.749,40.386 -154.305,36.83 -154.305,19.939 -148.082,13.716 ; -148.082,9.906 -148.082,13.716
  Bottom Layer w0.381: R3.2@-104.281,41.9 -104.271,41.91 -102.362,41.91 -100.33,39.878 -83.82,39.878 -82.755,40.943 -82.755,41.005 -82.423,41.336 MAX7219.19
  Bottom Layer w0.762: -133.35,55.659 -133.35,46.746 -133.096,46.492 v2(-133.096,46.355) ; R2.2 -125.945,41.465 -120.943,41.465 R1.2 ; R2.2@-126.008,41.452 -125.73,41.73 -125.73,44.329 -125.222,44.837 DS1307.8 ; v2(-110.744,10.033) -90.805,10.033 -89.729,8.957 -89.623,8.957 -89.154,8.488 MAX98357.7 ; C1.1 -107.188,47.526 -107.188,42.163 -107.113,42.088 -104.469,42.088 -104.281,41.9 R3.2 ; C3.1 -44.958,38.989 -43.307,40.64 -43.307,42.672 L1.2 -43.053,43.18 -45.085,45.212 -45.085,51.054 -42.545,53.594 -29.21,53.594 -27.637,52.021 LM2596.4 ; v2(-11.938,16.002) -8.636,19.304 v2(-8.509,19.304)
G: "LED 7 SEG.10" MAX7219.15 | length 235
  Top Layer w0.381: -104.778,55.535 -104.778,57.147 -99.949,61.976 v1(-81.534,61.976) -81.471,61.976 -75.629,67.818 v1(-75.565,67.818) ; MAX7219.15 -72.263,39.243 -60.96,27.94 -47.244,27.94 -46.355,27.051 -46.355,23.114 -45.72,22.479 -23.207,22.479 -22.222,23.464 -22.222,25.019
  Bottom Layer w0.381: v1(-81.534,61.976) -80.648,61.09 -80.648,55.535 -80.648,54.981 ; v1(-75.565,67.818) -11.176,67.818 -2.794,59.436 -2.794,27.178 -4.953,25.019 -22.222,25.019
GND: "Battery 3V.2" "Button 1.2" "Button 2.2" "LED RGB.1" "LED RGB.4" "LED RGB.5" "LED RGB.8" "OLED 1.3 INCH.2" "V+  GND.2" C1.2 C2.2 C3.2 C5.2 C6.2 DS1307.4 ESP32S3.J1_22 ESP32S3.J3_1 ESP32S3.J3_21 ESP32S3.J3_22 INMP441.1 INS1.A JP2.1 JP4.1 LM2596.3 LM2596.5 LM2596.6 MAX7219.4 MAX7219.9 MAX98357.6 Q1.1 U2.22 U2.23 U2.24 U2.44
LED: ESP32S3.J3_20 R5.1 | length 11
  Top Layer w0.381: ESP32S3.J3_20 -9.305,7.186 -9.305,6.638 -7.874,5.207 -2.159,5.207 -1.651,5.715 R5.1
LOAD: MAX7219.12 U2.26 | length 85.8
  Top Layer w0.381: U2.26 -143.002,37.973 -139.192,41.783 -107.811,41.783 -103.493,46.101 v1(-96.52,46.101)
  Bottom Layer w0.381: v1(-96.52,46.101) -68.453,46.101 -67.183,47.371 MAX7219.12
lrc: MAX98357.1 U2.4 | length 40.6
  Top Layer w0.381: U2.4 -104.902,11.176 -103.124,12.954 -75.184,12.954 -73.914,11.684 MAX98357.1
NetC5_1: "V+  GND.1" C5.1 LM2596.1 | length 30.5
  Bottom Layer w0.762: LM2596.1 -32.737,46.072 -32.131,45.466 -21.661,45.466 C5.1
  Bottom Layer w1.27: C5.1 -18.105,49.022 -7.112,49.022
NetD1_2: "LED RGB.2" R5.2 | length 15.1
  Top Layer w0.381: -10.287,12.423 -10.287,14.605 -9.652,15.24 -3.048,15.24 -1.651,13.843 R5.2
NetH1_1: "Battery 3V.1" DS1307.3 | length 43.5
  Bottom Layer w0.762: -154.051,61.849 -151.892,64.008 -124.206,64.008 -120.142,59.944 DS1307.3
NetIC1_1: DS1307.1 Y1.2 | length 13.3
  Top Layer w0.381: Y1.2 -138.076,53.467 -137.507,52.898 DS1307.1
NetIC1_2: DS1307.2 Y1.1 | length 17.1
  Top Layer w0.381: Y1.1 -123.444,50.927 -122.682,51.689 DS1307.2
NetINS1_C: INS1.C L1.1 LM2596.2 | length 18.6
  Bottom Layer w0.762: L1.1 -37.985,42.938 -37.985,49.137 INS1.C -37.997,51.473 -37.273,52.197 -31.434,52.197 -30.988,51.751 -30.988,49.248 LM2596.2
NetLS1_2: Buzzer.2 Q1.2 | length 9
  Bottom Layer w0.381: Q1.2 -157.353,47.117 Buzzer.2
NetQ1_3: Q1.3 R4.2 | length 3
  Bottom Layer w0.381: Q1.3 -152.146,42.418 R4.2
NetR3_1: MAX7219.18 R3.1 | length 26.2
  Bottom Layer w0.381: R3.1 -81.51,38.886 -79.756,40.64 -79.756,41.463 MAX7219.18
RX: ESP32S3.J1_10 U2.11 | length 109.9
  Top Layer w0.381: v1(-113.792,2.413) -71.755,2.413 -60.325,13.843 v1(-56.007,13.843)
  Bottom Layer w0.381: U2.11 -122.682,3.048 -122.047,2.413 v1(-113.792,2.413) ; v1(-56.007,13.843) -43.18,13.843 -41.402,15.621 -41.402,24.511 -34.925,30.988 ESP32S3.J1_10
SCK: INMP441.3@-107.442,59.182 U2.39 | length 26.2
  Bottom Layer w0.381: U2.39 -109.982,56.642 INMP441.3@-107.442,59.182
SCK_2: ESP32S3.J3_6 INMP441.3@-58.674,59.436 | length 73.4
  Bottom Layer w0.381: INMP441.3@-58.674,59.436 -60.706,57.404 -60.706,5.588 -59.436,4.318 -45.974,4.318 -45.085,5.207 ESP32S3.J3_6
SCL: "OLED 1.3 INCH.3" DS1307.6 R2.1 U2.33 | length 33.7
  Bottom Layer w0.381: -128.27,55.659 -128.27,47.879 -127.508,47.117 ; U2.33 -125.222,37.592 -125.984,38.354 -127.762,38.354 -129.008,39.6 R2.1 -129.008,45.617 -127.508,47.117 ; DS1307.6 -120.301,45.117 -120.301,45.625 -121.793,47.117 -127.508,47.117
SD: JP4.3 U2.37 | length 25.4
  Bottom Layer w0.381: JP4.3 -115.697,58.984 -115.062,58.349 U2.37
SD_2: ESP32S3.J3_8 JP2.3 | length 87.9
  Bottom Layer w0.381: JP2.3 -65.024,59.436 -62.992,57.404 -62.992,3.175 -61.087,1.27 -41.529,1.27 -40.005,2.794 ESP32S3.J3_8
SD_Loa: MAX98357.5
SDA: "OLED 1.3 INCH.4" DS1307.5 R1.1 U2.34 | length 31.9
  Bottom Layer w0.381: -125.73,55.659 -127,54.389 -127,51.689 -126.111,50.8 -122.555,50.8 -117.608,45.853 -117.608,44.964 DS1307.5 -117.602,41.807 R1.1 -117.88,39.219 -118.999,38.1 -121.92,38.1 -122.682,37.338 U2.34
Seg1: "LED 7 SEG.8"@-99.698,55.535 MAX7219.2 | length 16.2
  Bottom Layer w0.381: -99.698,55.535 -99.698,48.517 -98.552,47.371 -93.599,47.371 -92.671,48.299 -92.671,49.442 MAX7219.2
Seg2: "LED 7 SEG.8"@-75.568,55.535 MAX7219.11 | length 8.5
  Bottom Layer w0.381: -75.568,55.535 -75.568,55.178 -75.232,54.842 -75.035,54.842 MAX7219.11
Seg3: "LED 7 SEG.3"@-51.435,55.499 MAX7219.6 | length 35.7
  Top Layer w0.381: MAX7219.6 -82.423,51.181 -80.772,52.832 -51.943,52.832 -51.435,53.34 -51.435,55.499
Seg4: "LED 7 SEG.3"@-27.305,55.535 MAX7219.7 | length 62.5
  Top Layer w0.381: MAX7219.7 -79.883,50.927 -79.375,51.435 -54.864,51.435 v1(-52.578,49.149) ; v1(-48.26,44.958) -35.687,44.958 -27.305,53.34 -27.305,55.535
  Bottom Layer w0.381: v1(-52.578,49.149) -52.514,49.149 -48.323,44.958 v1(-48.26,44.958)
SW: INMP441.2@-107.442,61.722 U2.38 | length 31.7
  Bottom Layer w0.381: U2.38 -112.522,59.817 -110.617,61.722 INMP441.2@-107.442,61.722
SW_2: ESP32S3.J3_7 INMP441.2@-58.674,61.976 | length 83.4
  Bottom Layer w0.381: INMP441.2@-58.674,61.976 -58.755,61.895 -59.771,61.895 -61.849,59.817 -61.849,4.445 -60.198,2.794 -43.657,2.794 -42.545,3.906 ESP32S3.J3_7
TX: ESP32S3.J1_11 U2.10 | length 111.7
  Top Layer w0.381: U2.10 -120.142,2.54 -118.999,1.397 -69.596,1.397 -59.309,11.684 v1(-56.134,11.684)
  Bottom Layer w0.381: v1(-56.134,11.684) -41.656,11.684 -39.37,13.97 -39.37,23.749 -32.385,30.734 ESP32S3.J1_11
pads on no net: "LED 7 SEG.3"@-75.565,25.019 "LED 7 SEG.3"@-99.695,25.019 "LED 7 SEG.8"@-27.302,25.019 "LED 7 SEG.8"@-51.432,24.983 "LED RGB.6" "LED RGB.7" "LED RGB.SH1" "LED RGB.SH2" "OLED 1.3 INCH." DS1307.7 ESP32S3.J1_1 ESP32S3.J1_2 ESP32S3.J1_3 ESP32S3.J1_4 ESP32S3.J1_5 ESP32S3.J1_6 ESP32S3.J1_7 ESP32S3.J1_8 ESP32S3.J1_9 ESP32S3.J1_12 ESP32S3.J1_13 ESP32S3.J1_14 ESP32S3.J1_15 ESP32S3.J1_16 ESP32S3.J1_17 ESP32S3.J1_18 ESP32S3.J1_19 ESP32S3.J1_20 ESP32S3.J3_2 ESP32S3.J3_3 ESP32S3.J3_4 ESP32S3.J3_5 ESP32S3.J3_9 ESP32S3.J3_10 ESP32S3.J3_11 ESP32S3.J3_12 ESP32S3.J3_13 ESP32S3.J3_14 ESP32S3.J3_15 ESP32S3.J3_16 ESP32S3.J3_17 ESP32S3.J3_18 ESP32S3.J3_19 MAX7219.3 MAX7219.5 MAX7219.8 MAX7219.10 MAX7219.24 MAX98357.4 U2.3 U2.6 U2.7 U2.9 U2.12 U2.13 U2.14 U2.15 U2.16 U2.17 U2.18 U2.19 U2.29 U2.30 U2.31 U2.35 U2.36 U2.40 U2.41 U2.42 U2.43

## Polygon pours and split planes (outlines as drawn)
GND on Top Layer "NONET_L-01_P-001" (solid, remove dead copper, pour order 0): -0.254,68.834 -0.254,-0.127 -162.56,-0.127 -162.56,68.834
GND on Bottom Layer "NONET_L-01_P-001" (solid, remove dead copper, pour order 1): -0.254,68.834 -0.254,-0.127 -162.56,-0.127 -162.56,68.834

## Keep-outs
Keep-Out Layer:
  the board outline again, w0.254

## Silkscreen, mask and mechanical layers (free items; w line width, h text height)
Bottom Overlay:
  text "Học viện Kỹ thuật Mật Mã" at -11.926,3.753 h2.54
  text "Đồng hồ thông minh" at -14.183,1.084 h2.54

## Text inside footprints (layer, text, board x,y; h text height)
Buzzer: Bottom Overlay "+" at -153.581,56.375 h1.52 r90
U2: Bottom Overlay "3V3" at -98.319,8.465 h0.78 r180; Bottom Overlay "3V3" at -100.986,8.465 h0.78 r180; Bottom Overlay "RST" at -103.399,8.465 h0.78 r180; Bottom Overlay "4" at -105.283,8.462 h0.77 r180; Bottom Overlay "5" at -107.569,8.462 h0.77 r180; Bottom Overlay "6" at -110.236,8.462 h0.77 r180; Bottom Overlay "7" at -112.776,8.462 h0.77 r180; Bottom Overlay "15" at -115.581,8.465 h0.78 r180; Bottom Overlay "16" at -117.994,8.465 h0.78 r180; Bottom Overlay "17" at -120.534,8.465 h0.78 r180; Bottom Overlay "18" at -123.201,8.465 h0.78 r180; Bottom Overlay "8" at -125.476,8.462 h0.77 r180; Bottom Overlay "3" at -128.016,8.462 h0.77 r180; Bottom Overlay "46" at -130.948,8.465 h0.78 r180; Bottom Overlay "9" at -133.096,8.462 h0.77 r180; Bottom Overlay "11" at -138.314,8.465 h0.78 r180; Bottom Overlay "12" at -140.981,8.465 h0.78 r180; Bottom Overlay "13" at -143.521,8.465 h0.78 r180; Bottom Overlay "14" at -146.061,8.465 h0.78 r180; Bottom Overlay "10" at -135.901,8.465 h0.78 r180; Bottom Overlay "5V" at -148.601,8.465 h0.78 r180; Bottom Overlay "GND" at -151.786,8.465 h0.78 r180; Bottom Overlay "GND" at -96.245,31.54 h0.78; Bottom Overlay "TX" at -99.176,31.54 h0.78; Bottom Overlay "RX" at -101.843,31.54 h0.78; Bottom Overlay "1" at -104.648,31.543 h0.77; Bottom Overlay "2" at -107.061,31.543 h0.77; Bottom Overlay "42" at -109.082,31.54 h0.78; Bottom Overlay "41" at -111.876,31.54 h0.78; Bottom Overlay "35" at -127.116,31.54 h0.78; Bottom Overlay "36" at -124.449,31.54 h0.78; Bottom Overlay "37" at -122.163,31.54 h0.78; Bottom Overlay "38" at -119.369,31.54 h0.78; Bottom Overlay "39" at -116.829,31.54 h0.78; Bottom Overlay "40" at -114.289,31.54 h0.78; Bottom Overlay "0" at -129.921,31.543 h0.77; Bottom Overlay "45" at -132.195,31.54 h0.78; Bottom Overlay "47" at -137.148,31.54 h0.78; Bottom Overlay "48" at -134.608,31.54 h0.78; Bottom Overlay "21" at -139.943,31.54 h0.78; Bottom Overlay "19" at -145.023,31.54 h0.78; Bottom Overlay "20" at -142.355,31.54 h0.78; Bottom Overlay "GND" at -146.918,31.54 h0.78; Bottom Overlay "GND" at -149.712,31.667 h0.78; Bottom Overlay "13" at -143.521,8.465 h0.78 r180; Bottom Overlay "46" at -130.948,8.465 h0.78 r180; Bottom Overlay "3" at -128.016,8.462 h0.77 r180; Bottom Overlay "8" at -125.476,8.462 h0.77 r180; Bottom Overlay "18" at -123.201,8.465 h0.78 r180; Bottom Overlay "16" at -117.994,8.465 h0.78 r180; Bottom Overlay "15" at -115.581,8.465 h0.78 r180; Bottom Overlay "7" at -112.776,8.462 h0.77 r180; Bottom Overlay "6" at -110.236,8.462 h0.77 r180; Bottom Overlay "5" at -107.569,8.462 h0.77 r180; Bottom Overlay "4" at -105.283,8.462 h0.77 r180; Bottom Overlay "RST" at -103.399,8.465 h0.78 r180; Bottom Overlay "3V3" at -100.986,8.465 h0.78 r180; Bottom Overlay "3V3" at -98.319,8.465 h0.78 r180; Bottom Overlay "3V3" at -98.319,8.465 h0.78 r180; Bottom Overlay "3V3" at -100.986,8.465 h0.78 r180; Bottom Overlay "RST" at -103.399,8.465 h0.78 r180; Bottom Overlay "4" at -105.283,8.462 h0.77 r180; Bottom Overlay "5" at -107.569,8.462 h0.77 r180; Bottom Overlay "6" at -110.236,8.462 h0.77 r180; Bottom Overlay "7" at -112.776,8.462 h0.77 r180; Bottom Overlay "15" at -115.581,8.465 h0.78 r180; Bottom Overlay "16" at -117.994,8.465 h0.78 r180; Bottom Overlay "18" at -123.201,8.465 h0.78 r180; Bottom Overlay "8" at -125.476,8.462 h0.77 r180; Bottom Overlay "3" at -128.016,8.462 h0.77 r180; Bottom Overlay "46" at -130.948,8.465 h0.78 r180; Bottom Overlay "13" at -143.521,8.465 h0.78 r180